# EAGLE board Useless USB Gift Board (EAGLE 7.6.0)

Size 19 x 80 mm. Coordinates in mm from the lower left corner, seen from the top.
Outline: 0,0 19,0 19,80 0,80 0,0
Copper layers (1*16): Top 0.035mm / dielectric 1.5mm / Bottom 0.035mm
Design rules "default": minimum track width 10mil, minimum drill 24mil, track to track 8mil, track to pad 8mil, pad to pad 8mil, via to via 8mil, smd to smd 8mil, copper to edge 40mil, drill to drill 8mil, minimum pad ring 10mil, minimum via ring 8mil, stop-mask expansion 4mil, vias tented up to drill 0mil, thermal gap 10mil

## Footprints (pad centres in the part's own frame; a part is rotated, then mirrored left to right if it is on the bottom)
LED5MM = drill 0.813 pad 1.676 octagon: A -1.27,0; K 1.27,0
SIP10 = drill 0.6 long: 1 -11.46,0; 2 -8.92,0; 3 -6.38,0; 4 -3.84,0; 5 -1.3,0; 6 1.24,0; 7 3.78,0; 8 6.32,0; 9 8.86,0; 10 11.4,0
USB-FEMALE-A-PTH = drill 0.9: D+ 5.9,1.3; D- 7.9,1.3; GND 3.4,1.3; VBUS 10.4,1.3 | drill 3: GND@1 13.5,4; GND@2 0.3,4
MOLEX_480371000 = smd 1.2 x 2: 1 3.5,2.6; 2 1,2.6; 3 -1,2.6; 4 -3.5,2.6 | drill 2.5: M1 -5.7,0; M2 5.7,0 | hole 1.1: -2.25,0; 2.25,0

## Placement (x,y rotation side)
L_BLUE  [LED5MM]  9.5,45.5 0 top
L_RED  [LED5MM]  9.5,66.5 0 top
L_WHITE  [LED5MM]  9.5,56 0 top
RN1  [SIP10]  5.5,24.5 90 top
U$1  USB  [USB-FEMALE-A-PTH]  2.5,73 0 top
X1  USB-A  [MOLEX_480371000]  9.5,2.5 0 top

## Library data of the parts
L_BLUE L_RED L_WHITE X1 = adafruit
RN1 = resistor-sip
U$1 = STUNTAZ

## Nets
N$1: RN1.1 U$1.GND X1.4
N$2: L_BLUE.K RN1.2
N$3: U$1.D+ X1.3
N$4: U$1.D- X1.2
N$5: L_RED.K RN1.8
N$6: L_WHITE.K RN1.6
VCC: L_BLUE.A L_RED.A L_WHITE.A U$1.VBUS X1.1

## Tracks (layer width: path | path; a pad name or v marks a point on that pad's centre or on a via)
N$1  (2 unrouted)
N$2  (1 unrouted)
N$3  (1 unrouted)
N$4  (1 unrouted)
N$5  (1 unrouted)
N$6  (1 unrouted)
VCC  (4 unrouted)

## Text on the board
tNames: FRENCH USB | FRENCH USB | GND | GND
bNames: PCBv2 - 2019.09 | FredericTorres.com